# Altium PCB MCS17.PcbDoc (part 1 of 3)
Units mil, origin at the board's own origin, x right, y up, seen from the top; angles counter-clockwise.
Board outline 8500 x 5400 mil, 2 copper layers (Top Layer, Bottom Layer), stack 81.54 mil thick; 114 components, 70 nets, 364 pads, 106 vias.
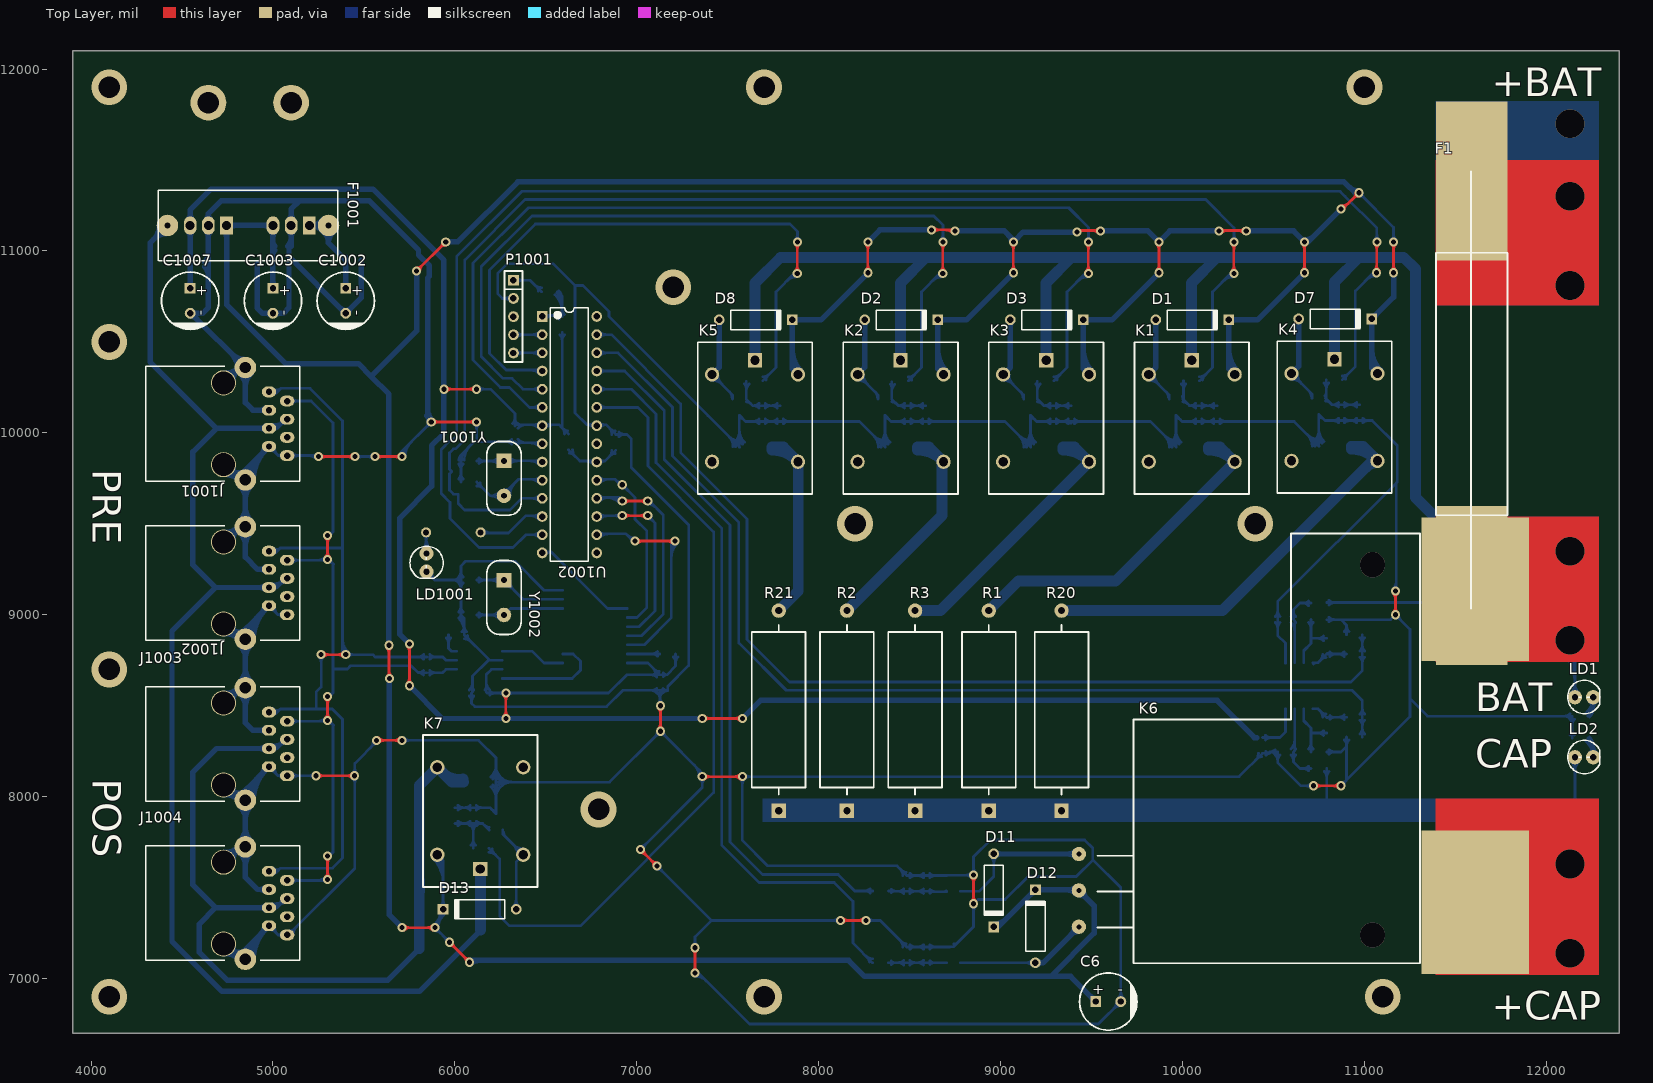
[diagram p0: Top Layer view]
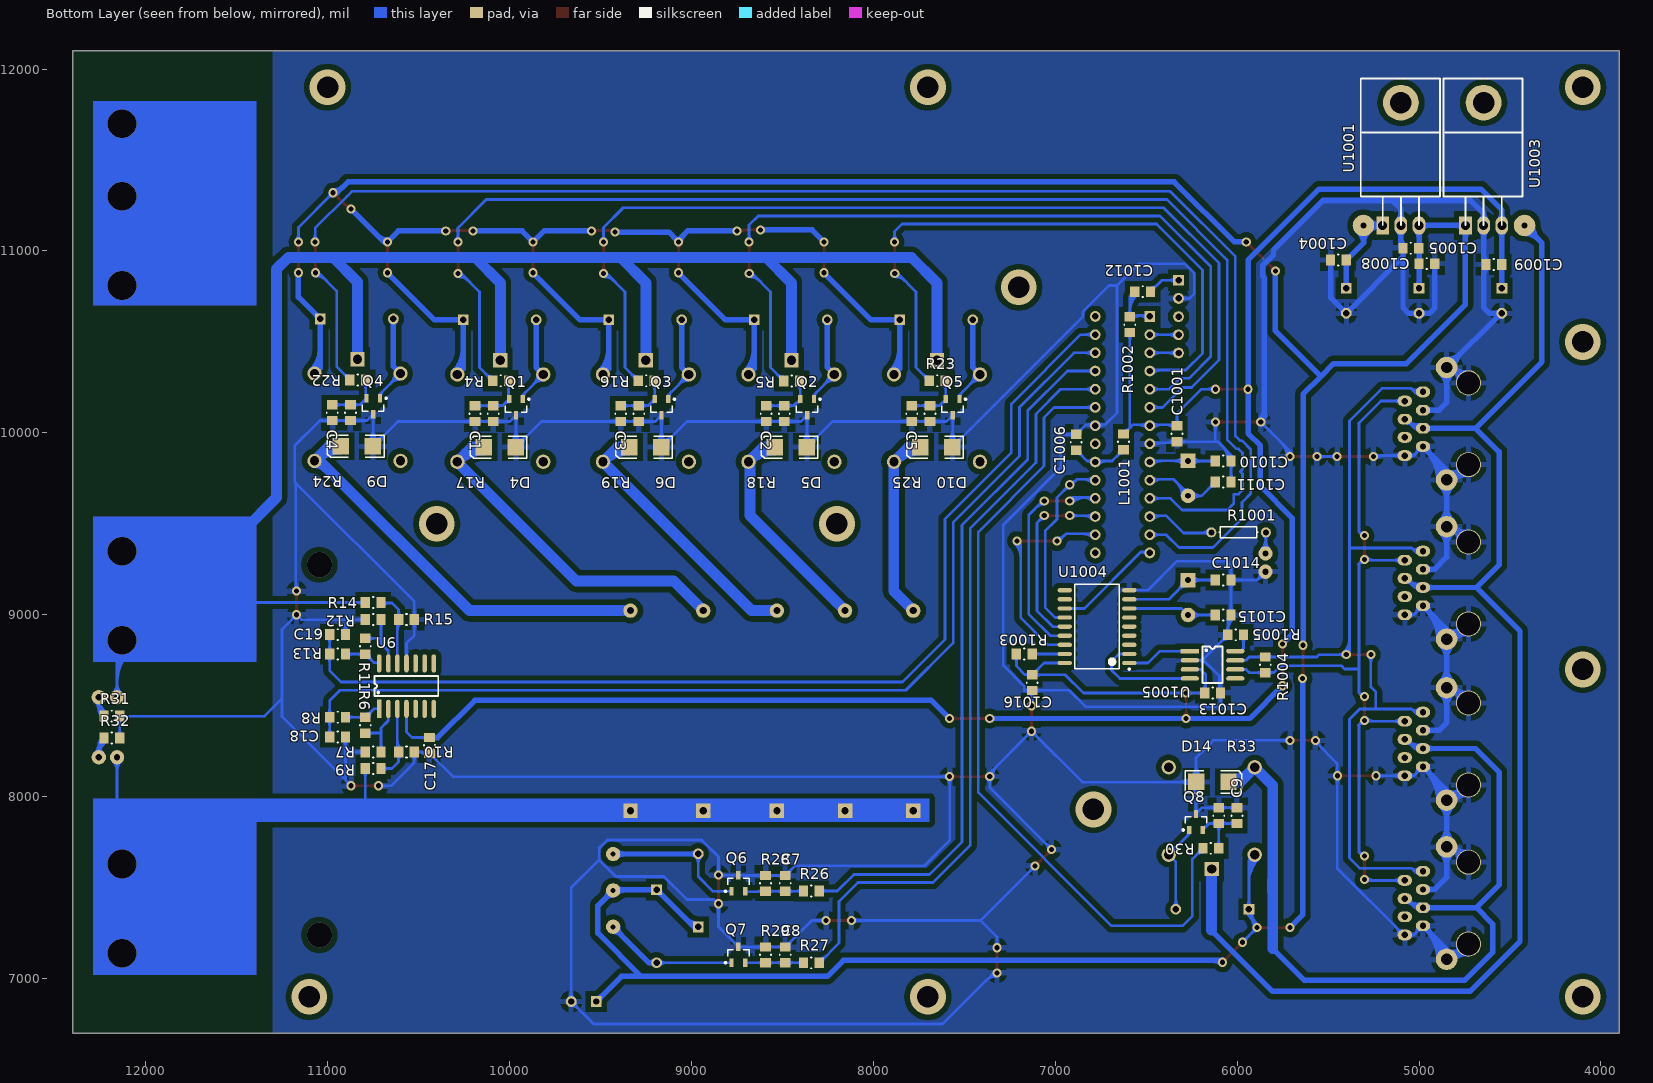
[diagram p1: Bottom Layer view, seen from below]
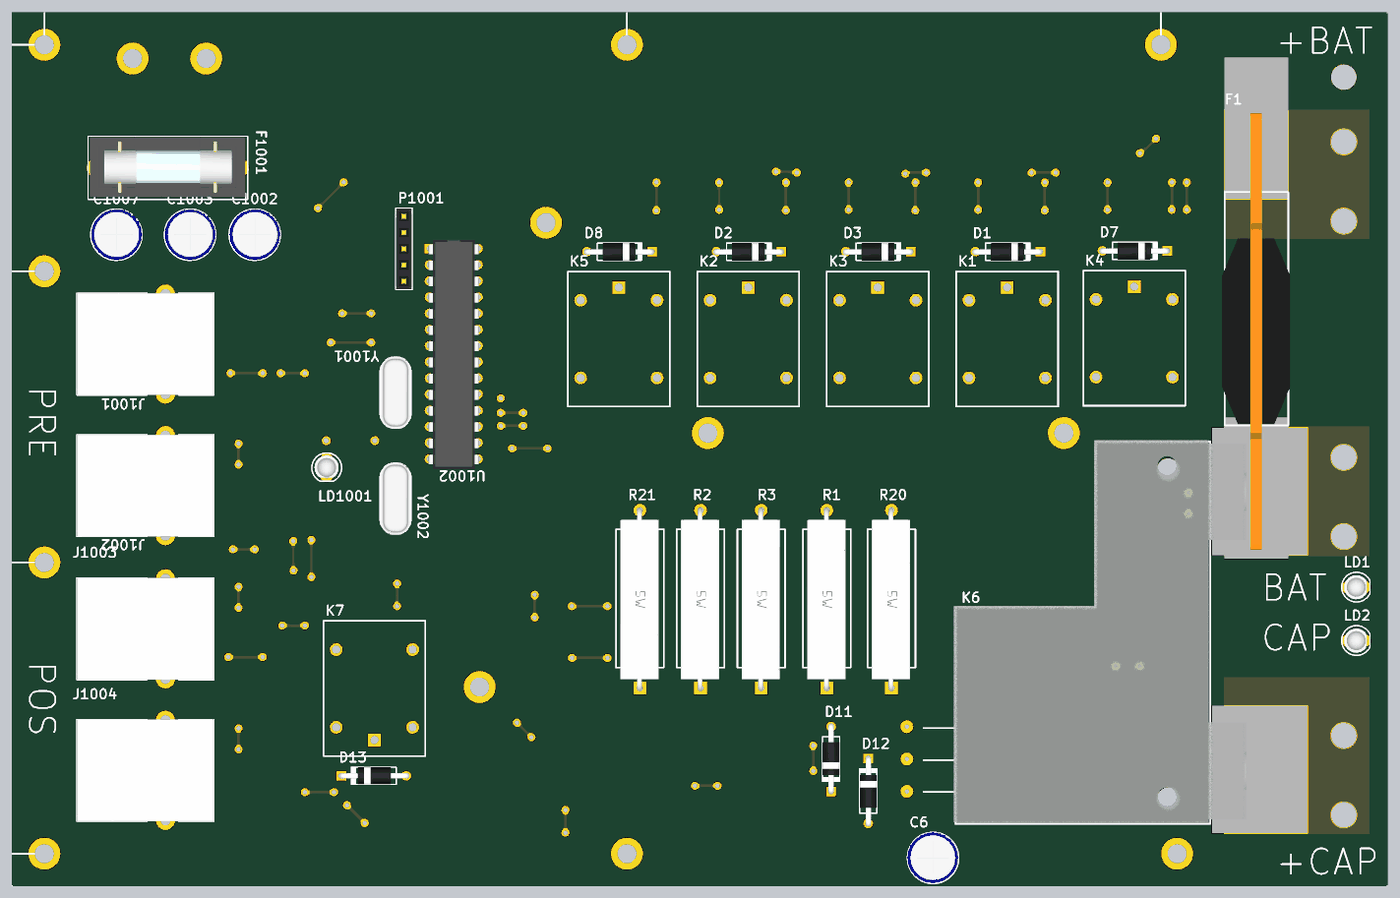
[diagram p4: 3D render of the assembled board from above, using the file's embedded part models]
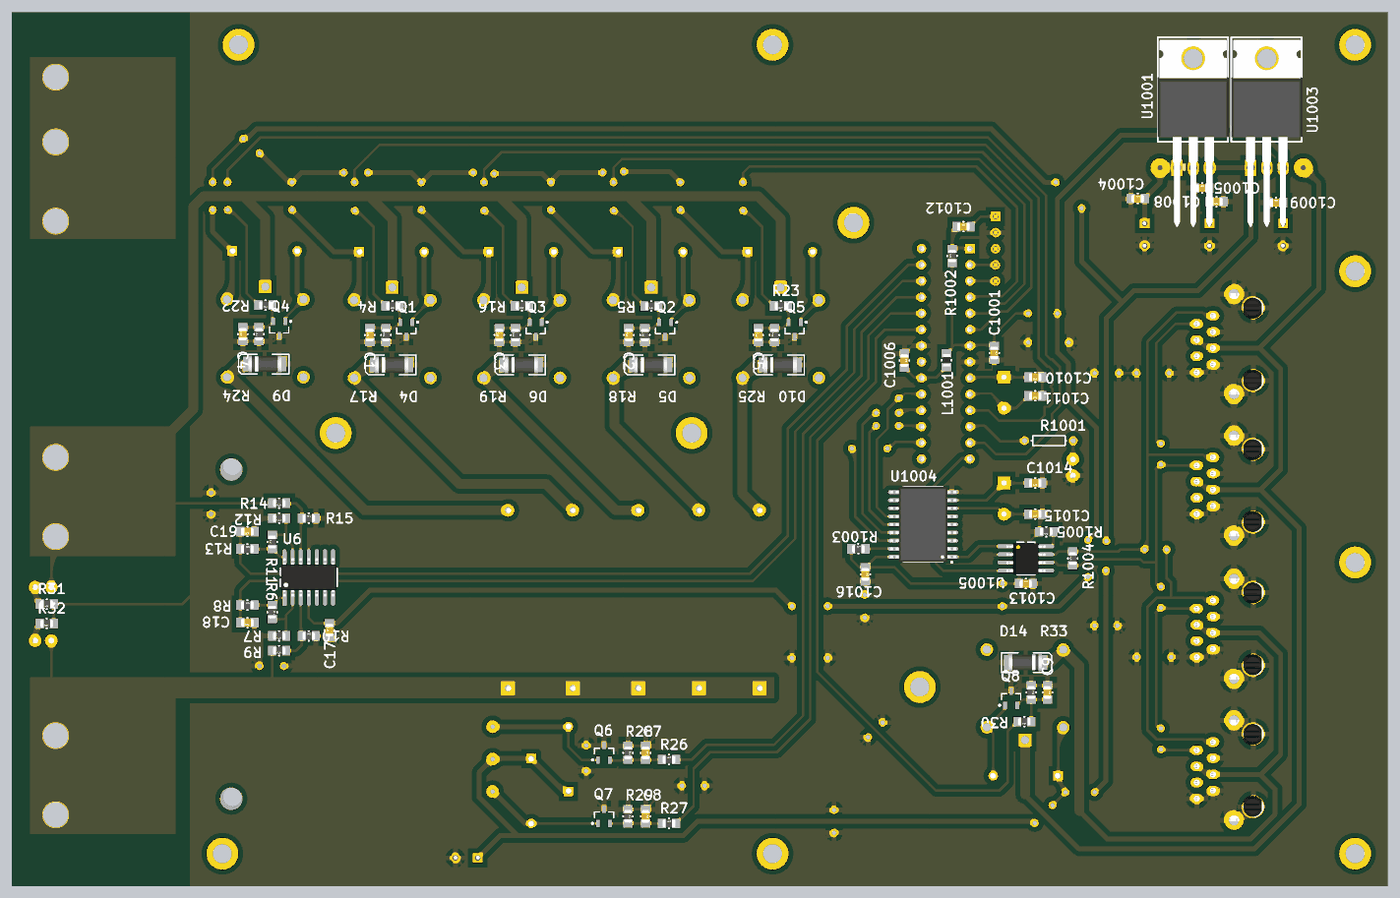
[diagram p5: 3D render of the assembled board from below, using the file's embedded part models]

## Layer stack, top to bottom
Top Layer: signal copper 1.4
Dielectric: core 78.7402, FR-4, Dk 4.8
Bottom Layer: signal copper 1.4

## Board outline
12400,12100 12400,6700 3900,6700 3900,12100

## Design rules (kind name [scope] priority, off if disabled: settings)
Clearance [All] p1: gap=30
PlaneClearance [All] p1: clearance=30
PlaneConnect [All] p1: planeconnectstyle=Relief reliefexpansion=20 reliefentries=4 reliefconductorwidth=30 reliefairgap=10
PolygonConnect [All] p1: connectstyle=Relief reliefconductorwidth=30 reliefentries=4 polygonreliefangle="90 Angle"
RoutingVias [All] p1: holewidth=28 width=50 viastyle="Through Hole" minholewidth=28 minwidth=50 maxholewidth=28 maxwidth=50
SilkscreenOverComponentPads [All] p1: minsilkscreentomaskgap=10
SolderMaskExpansion [All] p1: expansion=4
Width [All] p1: maxlimit=60 minlimit=15 preferedwidth=30
25 further rules are at their usual default settings.

## Classes and differential pairs
component class signals: C17 C18 C19 R6 R7 R8 R9 R10 R11 R12 R13 R14 R15 U6
component class relays: C1 C2 C3 C4 C5 C6 C7 C8 C9 D1 D2 D3 D4 D5 D6 D7 D8 D9 D10 D11 D12 D13 D14 F1 K1 K2 K3 K4 K5 K6 K7 LD1 LD2 Q1 Q2 Q3 Q4 Q5 Q6 Q7 Q8 R1 R2 R3 R4 R5 R16 R17 R18 R19 R20 R21 R22 R23 R24 R25 R26 R27 R28 R29 R30 R31 R32 R33
component class atmega: C10 C11 C12 C13 C14 C15 C16 C1001 C1002 C1003 C1004 C1005 C1006 C1007 C1008 C1009 C1010 C1011 C1012 C1013 C1014 C1015 C1016 F1001 J1 J2 J3 J4 J1001 J1002 J1003 J1004 L1 L1001 LD1001 P1 P1001 R1001 R1002 R1003 R1004 R1005 U1 U2 U3 U4 U5 U1001 U1002 U1003 U1004 U1005 Y1 Y2 Y1001 Y1002

## Components (designator, comment, footprint, x,y, rotation, side; value= is the part's Value field where it differs from the comment)
C1 "100nF" 0805C 10188.78,10106.26 r90 bottom
C2 "100nF" 0805C 8588.78,10106.26 r90 bottom
C3 "100nF" 0805C 9388.78,10106.26 r90 bottom
C4 "100nF" 0805C 10973.78,10111.26 r90 bottom
C5 "100nF" 0805C 7788.78,10106.26 r90 bottom
C6 "10uF" CP3.5mm-8.0mm 9522.8,6874 r180 top
C7 "100nF" 0805C 8484,7523.45 r270 bottom
C8 "100nF" 0805C 8484,7130.9 r270 bottom
C9 "100nF" 0805C 6001,7896.31 r270 bottom
C17 "100nF" 0805C 10439,8281.69 r90 bottom
C18 "100nF" 0805C 10945,8328 r0 bottom
C19 "100nF" 0805C 10945,8891 r0 bottom
C1001 "100nF" 0805C 6330,9995 r270 bottom
C1002 "CapacitorPol" CP3.5mm-8.0mm 5400,10795 r90 top
C1003 "CapacitorPol" CP3.5mm-8.0mm 5000,10795 r90 top
C1004 "100nF" 0805C 5443.31,10950 r180 bottom
C1005 "100nF" 0805C 5045,11015 r180 bottom
C1006 "100nF" 0805C 6885,9948.31 r270 bottom
C1007 "CapacitorPol" CP3.5mm-8.0mm 4545,10795 r90 top
C1008 "100nF" 0805C 4956.69,10930 r0 bottom
C1009 "100nF" 0805C 4588.31,10925 r180 bottom
C1010 "22pF" 0805C 6076.69,9845 r0 bottom
C1011 "22pF" 0805C 6076.69,9730 r0 bottom
C1012 "100nF" 0805C 6520,10776 r180 bottom
C1013 "100nF" 0805C 6135,8570 r180 bottom
C1014 "22pF" 0805C 6076.69,9191.06 r0 bottom
C1015 "22pF" 0805C 6076.69,8998.94 r0 bottom
C1016 "100nF" 0805C 7126.69,8626.69 r270 bottom
D1 "BYD77" DIO10.2-7X2.7 10053.78,10621.26 r0 top
D2 "BYD77" DIO10.2-7X2.7 8453.78,10621.26 r0 top
D3 "BYD77" DIO10.2-7X2.7 9253.78,10621.26 r0 top
D4 "MUR120" DSO-C2/X2.3 10053.78,9921.26 r0 bottom
D5 "MUR120" DSO-C2/X2.3 8453.78,9921.26 r0 bottom
D6 "MUR120" DSO-C2/X2.3 9253.78,9921.26 r0 bottom
D7 "BYD77" DIO10.2-7X2.7 10838.78,10626.26 r0 top
D8 "BYD77" DIO10.2-7X2.7 7653.78,10621.26 r0 top
D9 "MUR120" DSO-C2/X2.3 10838.78,9926.26 r0 bottom
D10 "MUR120" DSO-C2/X2.3 7653.78,9921.26 r0 bottom
D11 "MUR120" DIO10.2-7X2.7 8962,7485 r270 top
D12 "MUR120" DIO10.2-7X2.7 9191,7288 r90 top
D13 "BYD77" DIO10.2-7X2.7 6136,7381.31 r180 top
D14 "MUR120" DSO-C2/X2.3 6136,8081.31 r180 bottom
F1 "Fuse Mega 250A" FuseANL 11590,8760 r0 top
F1001 "250mA" "PORTA FUSIVEL" 5305.83,11140 r180 top
J1001 "RJ45 (canbus)" "ASSMANN A-2004-2-4-LP/FS" 4730,10050 r270 top
J1002 "RJ45 (canbus)" "ASSMANN A-2004-2-4-LP/FS" 4730,9175 r270 top
J1003 "RJ45 (canbus)" "ASSMANN A-2004-2-4-LP/FS" 4730,8290 r270 top
J1004 "RJ45 (canbus)" "ASSMANN A-2004-2-4-LP/FS" 4730,7415 r270 top
K1 "12V/10A" RELE 10050,10400 r0 top
K2 "12V/10A" RELE 8450,10400 r0 top
K3 "12V/10A" RELE 9250,10400 r0 top
K4 "12V/10A" RELE 10835,10405 r0 top
K5 "12V/10A" RELE 7650,10400 r0 top
K6 "Latch Relay K100A" K100A 9730,7085 r0 top locked
K7 "12V/10A" RELE 6139.78,7602.57 r180 top
L1001 "?H" 0805L 6625,9950 r90 bottom
LD1 "RED" LED3MM 12157,8547 r0 top
LD2 "GREEN" LED3MM 12157,8217 r0 top
LD1001 "GREEN" LED3MM 5844,9337 r270 top
P1001 "USART" HDR1X5 6322,10839 r270 top
Q1 "BCV27" SOT95P240-3N 9963.78,10141.26 r270 bottom
Q2 "BCV27" SOT95P240-3N 8363.78,10141.26 r270 bottom
Q3 "BCV27" SOT95P240-3N 9163.78,10141.26 r270 bottom
Q4 "BCV27" SOT95P240-3N 10748.78,10146.26 r270 bottom
Q5 "BCV27" SOT95P240-3N 7563.78,10141.26 r270 bottom
Q6 "BCV27" SOT95P240-3N 8741.6,7524.29 r90 bottom
Q7 "BCV27" SOT95P240-3N 8741.6,7131 r90 bottom
Q8 "BCV27" SOT95P240-3N 6226,7861.31 r90 bottom
R1 "4R7" R-AC10 8940,7931.5 r90 top
R2 "15R" R-AC10 8160,7931.5 r90 top
R3 "15R" R-AC10 8535,7931.5 r90 top
R4 "0805" 0805R 10048.78,10286.26 r0 bottom
R5 "0805" 0805R 8448.78,10284.57 r0 bottom
R6 "22k" 0805R 10792,8393 r270 bottom
R7 "100k" 0805R 10749,8246 r0 bottom
R8 "100k" 0805R 10945,8437 r180 bottom
R9 "100k" 0805R 10749,8155 r0 bottom
R10 "22k" 0805R 10566,8246 r180 bottom
R11 "22k" 0805R 10792,8827 r90 bottom
R12 "100k" 0805R 10749,8974 r0 bottom
R13 "100k" 0805R 10945,8784 r180 bottom
R14 "100k" 0805R 10749,9067 r0 bottom
R15 "22k" 0805R 10566,8974 r180 bottom
R16 "0805" 0805R 9248.78,10286.26 r0 bottom
R17 "0805" 0805R 10088.78,10106.26 r90 bottom
R18 "0805" 0805R 8488.78,10106.26 r90 bottom
R19 "0805" 0805R 9288.78,10106.26 r90 bottom
R20 "15R" R-AC10 9340,7931.5 r90 top
R21 "15R" R-AC10 7785,7931.5 r90 top
R22 "0805" 0805R 10833.78,10290.95 r0 bottom
R23 "0805" 0805R 7648.78,10286.26 r0 bottom
R24 "0805" 0805R 10873.78,10111.26 r90 bottom
R25 "0805" 0805R 7688.78,10106.26 r90 bottom
R26 "0805" 0805R 8340,7482 r180 bottom
R27 "0805" 0805R 8340,7087 r180 bottom
R28 "0805" 0805R 8593,7523.45 r270 bottom
R29 "0805" 0805R 8593,7130.9 r270 bottom
R30 "0805" 0805R 6144.31,7716.31 r0 bottom
R31 "0805" 0805R 12185.52,8443 r0 bottom
R32 "0805" 0805R 12185.52,8323 r0 bottom
R33 "0805" 0805R 6101,7896.31 r270 bottom
R1001 "470" AXIAL-0.3 5992,9453 r0 bottom
R1002 "10k" 0805R 6590,10595 r90 bottom
R1003 "10k" 0805R 7170,8785 r180 bottom
R1004 "120" 0805R 5845,8725 r90 bottom
R1005 "10k" 0805R 6008.31,8890 r0 bottom
U6 "LP324" SOIC14-150(50) 10716,8483 r270 bottom
U1001 "LM7812" TO220_DEITADO 5100,11297.48 r180 bottom
U1002 "ATmega328P" DIP28-300(100) 6480,10640 r270 top
U1003 "LM7805" TO220_DEITADO 4645,11297.48 r180 bottom
U1004 "MCP2515-E/SO" WSO18_L 6770,8935 r0 bottom
U1005 "MCP2551-I/SN" SOIC08-150(50) 6260,8800 r270 bottom
Y1001 "16MHz" HC49-US-THT 6270,9750 r270 top
Y1002 "16MHz" HC49-US-THT 6270,9095 r270 top

## Footprints (in the part's own frame and the unit in brackets; to place one, negate y for a bottom-side part, rotate by r counter-clockwise, add the part's x,y. Pads: shape width x height; smd on the part's side, far side on the other; paste and mask are expansions set on the pad)
0805C [mm] "Chip Capacitor; Body 2 x 1.3 mm (LxW typ)"
  rect 1.3x1.5 smd: 1(-1.1,0) 2(1.1,0)
  silkscreen extent -0.05,-0.76 0.05,0.76, body extent -1,-0.64 1,0.62, height 0.78
0805L [mm] "Chip Inductor; Body 2 x 1.3 mm (LxW typ)"
  rect 1.3x1.5 smd: 1(-1.1,0) 2(1.1,0)
  silkscreen extent -0.05,-0.76 0.05,0.76, body extent -1,-0.61 1,0.59, height 0.95
0805R [mm] "Chip Resistor; Body 2 x 1.3 mm (LxW typ)"
  rect 1.3x1.5 smd: 1(-1.1,0) 2(1.1,0)
  silkscreen extent -0.05,-0.76 0.05,0.76, body extent -1.01,-0.63 0.99,0.63, height 0.8
"ASSMANN A-2004-2-4-LP/FS" [mm]
  oval 1.5x2 hole 0.9: 1(-4.445,6.31) 2(-3.175,8.85) 3(-1.905,6.31) 4(-0.635,8.85) 5(0.635,6.31) 6(1.905,8.85) 7(3.175,6.31) 8(4.445,8.85)
  round 3 hole 1.6: S(-7.855,3.01) S(7.845,3.01)
  round 3.5 hole 3.2: S(-5.715,-0.04) S(5.715,-0.04)
  silkscreen extent -8,-10.9 8,10.6, body extent -8,-10.9 8,10.6, height 13.6
AXIAL-0.3 [mm] "Axial Device, Thru-Hole; 2 Leads; 0.3 in Pin Spacing"
  round 1.4 hole 0.85: 1(-3.81,0) 2(3.81,0)
  silkscreen extent -2.77,-0.76 2.77,0.76
CP3.5mm-8.0mm [mil] "Capacitor, Electrolytic, Radial; Body 8 x 10.5 mm (Dia.xH typ); Pin Spacing 3.5 mm (typ)"
  rect 60x60 hole 35: 1(0,0)
  round 60 hole 35: 2(-137.8,0)
  silkscreen extent -226,-157 89,157, body extent -226,-160 91,157, height 468
DIO10.2-7X2.7 [mm] "Diode, Axial; Body 7 x 2.7 mm (LxDia. max), Lead Dia. 0.53 mm (max)"
  round 1.5 hole 0.9: 1(-5.1,0)
  rect 1.5x1.5 hole 0.9: 2(5.1,0)
  silkscreen extent -3.5,-1.35 3.6,1.35, body extent -5.59,-1.4 5.44,1.34, height 2.73
DIP28-300(100) [mm] "DIP, 28-Leads, Row Spacing 7.62mm, Pitch 2.54mm, Body 34.67x7.3mm"
  rect 1.5x1.5 hole 0.9: 1(0,0)
  round 1.5 hole 0.9: 2(2.54,0) 3(5.08,0) 4(7.62,0) 5(10.16,0) 6(12.7,0) 7(15.24,0) 8(17.78,0) 9(20.32,0) 10(22.86,0) 11(25.4,0) 12(27.94,0) 13(30.48,0) 14(33.02,0) 15(33.02,7.62) 16(30.48,7.62) 17(27.94,7.62) 18(25.4,7.62) 19(22.86,7.62) 20(20.32,7.62) 21(17.78,7.62) 22(15.24,7.62) 23(12.7,7.62) 24(10.16,7.62) 25(7.62,7.62) 26(5.08,7.62) 27(2.54,7.62) 28(0,7.62)
  silkscreen extent -1.19,1.16 34.21,6.46, body extent -1.4,-0.13 34.6,7.74, height 5.08
DSO-C2/X2.3 [mm] "DO-214-AA/SMB; 2 C-Bend Leads; Body 5.3 x 3.6 mm, inc. leads (LxW)"
  rect 2.3x2.3 smd: 1(-2.25,0) 2(2.25,0)
  silkscreen extent -3.8,-1.55 4.1,1.55, body extent -2.62,-1.35 2.58,1.32, height 2.64
FuseANL [mm]
  rect 10x22.2 smd: 1(0,66.675) 2(0,10.16)
  silkscreen extent -5,6.98 5,67.98, body extent -5.42,0.48 5.31,69.06, height 18.95
HC49-US-THT [mil] "THT Quartz Crystal"
  rect 80x80 hole 32: 1(-96.06,0)
  round 80 hole 32: 2(96.06,0)
  silkscreen extent -203,-94 203,94, body extent -223,-91 224,92, height 138
HDR1X5 [mm] "Connector; Header; 5 Position"
  rect 1.5x1.5 hole 0.9: 1(0,0)
  round 1.5 hole 0.9: 2(2.54,0) 3(5.08,0) 4(7.62,0) 5(10.16,0)
  silkscreen extent -1.27,-1.27 11.43,1.27, body extent -1.27,-1.27 11.43,1.23, height 8.4
K100A [mm] "Latching Relay 100A, 12V coil"
  rect 15x20 smd: 1(47.752,8.509) 2(47.752,52.197)
  round 2 hole 0.7: 3(-7.62,15.24) 4(-7.62,10.16) 5(-7.62,5.08)
  silkscreen extent -5,0 40,60, body extent -0.28,0.23 45.72,60.23, height 21
LED3MM [mm]
  round 2 hole 0.889: 1(0,0) 2(2.54,0)
  silkscreen extent -1.03,-2.31 3.43,2.36, body extent -0.63,-1.9 2.87,1.9, height 5.5
"PORTA FUSIVEL" [mm]
  round 3 hole 0.8: 1(0,0) 2(22.5,0)
  silkscreen extent -1.27,-4.95 23.77,4.95, body extent -0.9,-4.8 23.5,4.6, height 12.6
R-AC10 [mm] "Cemented Wirewound Resistor 10 W"
  rect 2x2 hole 1: 1(-0.216,0.127)
  round 2 hole 1: 2(27.72,0.127)
  silkscreen extent 2.04,-3.62 25.72,3.88, body extent -0.65,-2.79 28.09,3.21, height 9.01
RELE [mm]
  rect 2x2 hole 1.3: 1(0,0)
  round 2 hole 1.3: 2(-6,-14.2) 3(6,-14.2) 4(6,-2) 5(-6,-2)
  silkscreen extent -8,-18.7 8,2.5, body extent -8.01,-18.66 8,2.52, height 15.4
SOIC08-150(50) [mil] "SOIC; 8 Leads; Row Spacing 3.81 mm; Pitch 1.27 mm; 3D Antonio Fagaldo"
  rect 25x100 smd: 1(0,0)
  oval 25x100 smd: 2(50,0) 3(100,0) 4(150,0) 5(150,250) 6(100,250) 7(50,250) 8(0,250)
  silkscreen extent -25,70 175,180, body extent -20,4 173,246, height 69
SOIC14-150(50) [mil] "Plastic Small Outline 14 pinos"
  rect 100x25 smd: 1(0,0)
  oval 100x25 smd: 2(0,50) 3(0,100) 4(0,150) 5(0,200) 6(0,250) 7(0,300) 8(-250,300) 9(-250,250) 10(-250,200) 11(-250,150) 12(-250,100) 13(-250,50) 14(-250,0)
  silkscreen extent -180,-25 -70,325, body extent -243,-22 -7,322, height 69
SOT95P240-3N [mm] "SOT23, 3-Leads, Body 2.9x1.3mm, Pitch 0.95mm, Lead Span 2.4mm, IPC Medium Density"
  rect 1.15x0.6 smd: 1(-1.125,0.95) 2(-1.125,-0.95) 3(1.125,0)
  silkscreen extent -1.25,-1.5 0.7,1.92, body extent -0.7,-1.5 0.7,1.5, height 1.14
TO220_DEITADO [mil]
  rect 70x100 hole 50: 1(-100,-157.48)
  oval 70x100 hole 50: 2(0,-157.48) 3(100,-157.48)
  silkscreen extent -220,-155 214,650, body extent -221,-522 220,632, height 185
WSO18_L [mm] "18-Pin Small Outline Integrated Circuit 1.27 mm Pitch, IPC High Density"
  oval 2x0.6 smd: 1(-4.5,5.08) 2(-4.5,3.81) 3(-4.5,2.54) 4(-4.5,1.27) 5(-4.5,0) 6(-4.5,-1.27) 7(-4.5,-2.54) 8(-4.5,-3.81) 9(-4.5,-5.08) 10(4.5,-5.08) 11(4.5,-3.81) 12(4.5,-2.54) 13(4.5,-1.27) 14(4.5,0) 15(4.5,1.27) 16(4.5,2.54) 17(4.5,3.81) 18(4.5,5.08)
  silkscreen extent -4.62,-5.9 3.1,6.05, body extent -5.21,-5.87 5.19,5.88, height 2.82

## Part data
C1 C2 C3 C4 C5 C7 C8 C9 C17 C18 C19: library part Cap, "Capacitor"
C6: library part CapacitorPol, "Solid Aluminum Capacitor with Organic Semiconductor Electrolyte: 100uF, 10V, Bulk Pack"
C1001 C1004 C1005 C1006 C1008 C1009 C1010 C1011 C1012 C1013 C1014 C1015 C1016: library part Cap_0805, "Capacitor"
C1002 C1003 C1007: "Solid Aluminum Capacitor with Organic Semiconductor Electrolyte: 100uF, 10V, Bulk Pack"
D1 D2 D3 D4 D5 D6 D7 D8 D9 D10 D11 D12 D13 D14: library part Diode, "Default Diode"
F1 F1001: library part "Fuse 1", "Fuse"
J1001 J1002 J1003 J1004: library part "Modular Jack with Shield", "YH-59-01"
K1 K2 K3 K4 K5 K6 K7: library part Relay, "SPDT Relay"
L1001: library part Ind_0805, "Inductor"
LD1 LD2 LD1001: library part LED_0805, "LED"
P1001: library part "Header 5", "Header, 5-Pin"
Q1 Q2 Q3 Q4 Q5 Q6 Q7 Q8: library part NPN1, "NPN Darlington Bipolar Transistor"
R1 R2 R3 R20 R21: library part ResistorPower, "Power Resistor"
R4 R5 R6 R7 R8 R9 R10 R11 R12 R13 R14 R15 R16 R17 R18 R19 R22 R23 R24 R25 R26 R27 R28 R29 R30 R31 R32 R33: library part Res1, "Resistor"
R1001 R1002 R1003 R1004 R1005: library part Res_0805, "Resistor"
U6: library part LM324, "Quadruple Operational Amplifier"
U1001 U1003: library part µA7805CKC, "Positive-Voltage Regulator"
U1002: "8-bit AVR Microcontroller, 32KB Flash, 1KB EEPROM, 2KB SRAM, 28-pin PDIP, Industrial Grade (-40°C to 85°C)"
U1004: library part CMP-0186-00035-2, "Stand-Alone CAN Controller With SPI Interface, 18-Pin SOIC, Extended Temperature"
U1005: library part CMP-1721-00003-1, "High-Speed CAN Transceiver, / 1 Mb/s, 4.5 to 5.5 V, 8-Pin SOIC (SN), Industrial Temperature, RoHS, Tube"
Y1001 Y1002: library part Crystal, "Crystal"

## Free pads (board coordinates)
  round 196.85 hole 118.11: 0(4645,11815) 0(5100,11815)

## Via types
v1: diameter 50, hole 28, Top Layer to Bottom Layer, 85 vias
v2: diameter 196.85, hole 118.11, Top Layer to Bottom Layer, 12 vias
v3: diameter 157.48, hole 157.48, Top Layer to Bottom Layer, 7 vias
v4: diameter 137.8, hole 137.8, Top Layer to Bottom Layer, 2 vias

## Nets (pads, with @x,y where several pads share a name; then routed paths per layer and width w, separated by ;. In a path a pad name is that pad's centre, name@x,y a point inside that pad or via, vN(x,y) a via of type N, cw(c..) or ccw(c..) an arc to the next point about the centre after c; other vN are vias at no path point)
+5V: C17.2 C1001.1 C1007.1 C1009.2 C1013.1 C1016.1 L1001.2 R1002.1 R1003.1 U6.4 U1002.7 U1003.3 U1004.18 U1005.3 | length 14510
  Top Layer w15: v1@5737.63,8622.37 ccw(c5707.75,8652.25) 5750,8652.25 ccw(c5792.25,8652.25) v1@5762.37,8622.37 ; v1@5737.63,8827.63 cw(c5707.75,8797.75) 5750,8797.75 cw(c5792.25,8797.75) v1@5762.37,8827.63 ; v1(5750,8610) v1(5750,8840) ; v1(5940,10240) v1(6120,10240) ; v1@5952.37,10227.63 cw(c5982.25,10197.75) 5982.25,10240 cw(c5982.25,10282.25) v1@5952.37,10252.37 ; v1@6107.63,10227.63 ccw(c6077.75,10197.75) 6077.75,10240 ccw(c6077.75,10282.25) v1@6107.63,10252.37 ; v1@6267.63,8442.37 ccw(c6237.75,8472.25) 6280,8472.25 ccw(c6322.25,8472.25) v1@6292.37,8442.37 ; v1@6267.63,8557.63 cw(c6237.75,8527.75) 6280,8527.75 cw(c6322.25,8527.75) v1@6292.37,8557.63 ; v1(6280,8430) v1(6280,8570) ; v1(7360,8430) v1(7580,8430) ; v1@7372.37,8417.63 cw(c7402.25,8387.75) 7402.25,8430 cw(c7402.25,8472.25) v1@7372.37,8442.37 ; v1@7567.63,8417.63 ccw(c7537.75,8387.75) 7537.75,8430 ccw(c7537.75,8472.25) v1@7567.63,8442.37
  Bottom Layer w15: v1(6120,10240) 6196.36,10240 6330,10106.36 C1001.1@6330,10038.31 ; v1@6132.37,10227.63 cw(c6162.25,10197.75) 6162.25,10240 cw(c6162.25,10282.25) v1@6132.37,10252.37 ; C1013.1@6165.52,8586.73 ccw(c6148.65,8603.59) 6172.5,8603.59 ; C1013.1@6172.5,8575.81 6172.5,8670.71 6201.79,8700 U1005.3@6260,8700 ; 6172.5,8631.63 ccw(c6236,8631.63) C1013.1@6191.1,8586.73 ; C1013.1@6178.31,8570 v1(6280,8570) 6845,8570 6945,8670 C1016.1@7126.69,8670 ; C1013.1@6191.1,8557.21 cw(c6221.98,8526.33) 6221.98,8570 cw(c6221.98,8613.67) C1013.1@6191.1,8582.79 ; v1@6267.63,8557.63 ccw(c6237.75,8527.75) 6237.75,8570 ccw(c6237.75,8612.25) v1@6267.63,8582.37 ; v1@6292.37,8557.63 cw(c6322.25,8527.75) 6322.25,8570 cw(c6322.25,8612.25) v1@6292.37,8582.37 ; C1001.1@6317.21,10051.1 ccw(c6286.33,10081.98) 6330,10081.98 ccw(c6373.67,10081.98) C1001.1@6342.79,10051.1 ; C1001.1@6336.69,10045 6573.31,10045 6590,10028.31 ; C1001.1@6346.73,10025.52 cw(c6393.77,9978.47) 6393.77,10045 ; C1001.1@6346.73,10051.1 ccw(c6361.45,10065.82) 6361.45,10045 ; 6414.75,10045 cw(c6414.75,9974.75) U1002.7@6464.42,10024.42 ; 6438.89,10045 ccw(c6438.89,10081.11) U1002.7@6464.42,10055.58 ; U1002.7@6495.58,10024.42 cw(c6545.25,9974.75) 6545.25,10045 ; U1002.7@6495.58,10055.58 ccw(c6521.11,10081.11) 6521.11,10045 ; R1002.1@6577.21,10538.9 cw(c6546.33,10508.02) 6590,10508.02 cw(c6633.67,10508.02) R1002.1@6602.79,10538.9 ; 6588.03,10030.27 cw(c6551.95,9994.19) L1001.2@6602.97,9993.54 ; R1002.1@6590,10551.69 6590,10028.31 ; 6596.9,10021.41 ccw(c6621.06,10045.57) L1001.2@6621.06,10011.4 ; L1001.2@6625,9993.31 6590,10028.31 ; U1004.18@6947.17,8735 7061.69,8735 C1016.1@7126.69,8670 ; 7089.09,8707.6 cw(c7051.49,8670) C1016.1@7104.67,8670 ; 7098.59,8698.1 ccw(c7122.76,8722.26) C1016.1@7122.76,8688.09 ; C1016.1@7109.96,8657.21 ccw(c7079.08,8626.33) 7079.08,8670 ccw(c7079.08,8713.67) C1016.1@7109.96,8682.79 ; C1016.1@7145.54,8659.76 cw(c7165,8646.4) 7165,8670 ; C1016.1@7145.54,8680.24 ccw(c7165,8693.6) 7165,8670 ; R1003.1@7200.52,8768.27 cw(c7169.63,8737.39) 7213.31,8737.39 cw(c7256.98,8737.39) R1003.1@7226.1,8768.27 ; R1003.1@7213.31,8785 7213.31,8718.31 7165,8670 ; C17.2@10439,8325 10535,8325 10566,8356 U6.4@10566,8483 ; C17.2@10455.73,8312.21 cw(c10486.61,8281.33) 10486.61,8325 cw(c10486.61,8368.67) C17.2@10455.73,8337.79 ; C1016.1@7126.69,8670 7165,8670
  Bottom Layer w30: U1003.3@4530.86,11110.86 cw(c4496.72,11076.72) 4545,11076.72 cw(c4593.28,11076.72) U1003.3@4559.14,11110.86 ; U1003.3@4530.86,11169.14 ccw(c4496.72,11203.28) 4545,11203.28 ccw(c4593.28,11203.28) U1003.3@4559.14,11169.14 ; C1007.1@4534.39,10805.61 ccw(c4508.79,10831.21) 4545,10831.21 ccw(c4581.21,10831.21) C1007.1@4555.61,10805.61 ; C1007.1@4545,10795 C1009.2@4545,10925 U1003.3@4545,11140 4545,11225 4660,11340 5550,11340 5940,10950 v1(5940,10240) 5940,9997.65 5872.8,9930.45 5872.8,9707.04 5697.5,9531.75 5697.5,8892.5 v1(5750,8840) ; v1(5750,8610) 5930,8430 6270,8430 v1(6280,8430) v1(7360,8430) ; v1(7580,8430) 7680,8530 10190,8530 10395,8325 10408.89,8325
+5V_ADC: C1006.2 L1001.1 U1002.20 | length 590.8
  Bottom Layer w15: L1001.1@6625,9906.69 6686.69,9845 6780,9845 6825,9845 ; L1001.1@6628.94,9888.6 cw(c6628.94,9854.43) 6653.1,9878.59 ; L1001.1@6647.03,9906.69 ccw(c6700.21,9906.69) 6662.6,9869.09 ; 6714.75,9845 cw(c6714.75,9774.75) U1002.20@6764.42,9824.42 ; 6738.89,9845 ccw(c6738.89,9881.11) U1002.20@6764.42,9855.58 ; U1002.20@6795.58,9855.58 ccw(c6821.11,9881.11) 6821.11,9845 ; U1002.20@6799.45,9829.65 cw(c6825,9816.05) 6825,9845 ; 6847.4,9867.4 ccw(c6809.79,9905) C1006.2@6862.97,9905 ; 6856.9,9876.9 cw(c6881.06,9852.74) C1006.2@6881.06,9886.91 ; C1006.2@6885,9905 6825,9845
+12V: C6.1 C1003.1 C1005.2 C1008.2 D1.2 D2.2 D3.2 D7.2 D8.2 D11.2 D12.2 D13.2 K1.4 K2.4 K3.4 K4.4 K5.4 K6.4 K7.4 U1001.3 U1003.1 | length 30217.2
  Top Layer w15: v1@5625.13,8820.13 cw(c5595.25,8790.25) 5637.5,8790.25 cw(c5679.75,8790.25) v1@5649.87,8820.13 ; v1@5627.63,8662.37 ccw(c5603.79,8686.21) 5637.5,8686.21 ; 5637.5,8698.28 ccw(c5688.28,8698.28) v1@5652.37,8662.37 ; v1(5637.5,8832.5) 5637.5,8652.5 v1(5640,8650) ; v1(5710,7280) v1(5890,7280) ; v1@5722.37,7267.63 cw(c5752.25,7237.75) 5752.25,7280 cw(c5752.25,7322.25) v1@5722.37,7292.37 ; v1(5790,10890) v1(5950,11050) ; v1@5790,10907.5 ccw(c5790,10949.75) 5819.87,10919.87 ccw(c5849.75,10890) v1@5807.5,10890 ; v1@5877.63,7267.63 ccw(c5847.75,7237.75) 5847.75,7280 ccw(c5847.75,7322.25) v1@5877.63,7292.37 ; v1@5932.5,11050 cw(c5890.25,11050) 5920.13,11020.13 cw(c5950,10990.25) v1@5950,11032.5 ; v1@5970,7182.5 cw(c5970,7140.25) 5999.87,7170.13 cw(c6029.75,7200) v1@5987.5,7200 ; v1(5970,7200) v1(6080,7090) ; v1@6062.5,7090 ccw(c6020.25,7090) 6050.13,7119.87 ccw(c6080,7149.75) v1@6080,7107.5 ; v1@8257.63,10892.37 ccw(c8227.75,10922.25) 8270,10922.25 ccw(c8312.25,10922.25) v1@8282.37,10892.37 ; v1@8257.63,11037.63 cw(c8227.75,11007.75) 8270,11007.75 cw(c8312.25,11007.75) v1@8282.37,11037.63 ; v1(8270,10880) v1(8270,11050) ; v1(8620.5,11116.11) v1@8743.89,11116.11 ; v1@8632.87,11103.74 cw(c8662.75,11073.86) 8662.75,11116.11 cw(c8662.75,11158.36) v1@8632.87,11128.49 ; 8693,11116.11 cw(c8693,11053) v1@8737.63,11097.63 ; 8722.51,11116.11 ccw(c8722.51,11137.49) v1@8737.63,11122.37 ; v1@9057.63,10892.37 ccw(c9027.75,10922.25) 9070,10922.25 ccw(c9112.25,10922.25) v1@9082.37,10892.37 ; v1@9057.63,11037.63 cw(c9027.75,11007.75) 9070,11007.75 cw(c9112.25,11007.75) v1@9082.37,11037.63 ; v1(9070,10880) v1(9070,11050) ; v1@9429.89,11112.5 v1@9547.5,11112.5 ; 9501.72,11112.5 cw(c9501.72,11061.72) v1@9537.63,11097.63 ; 9513.79,11112.5 ccw(c9513.79,11146.21) v1@9537.63,11122.37 ; v1@9857.63,10892.37 ccw(c9827.75,10922.25) 9870,10922.25 ccw(c9912.25,10922.25) v1@9882.37,10892.37 ; v1@9857.63,11037.63 cw(c9827.75,11007.75) 9870,11007.75 cw(c9912.25,11007.75) v1@9882.37,11037.63 ; v1(9870,10880) v1(9870,11050) ; v1@10202.5,11112.5 v1@10347.5,11112.5 ; v1@10212.37,11097.63 cw(c10248.28,11061.72) 10248.28,11112.5 ; v1@10212.37,11122.37 ccw(c10236.21,11146.21) 10236.21,11112.5 ; 10301.72,11112.5 cw(c10301.72,11061.72) v1@10337.63,11097.63 ; 10313.79,11112.5 ccw(c10313.79,11146.21) v1@10337.63,11122.37 ; v1@10657.63,10892.37 ccw(c10627.75,10922.25) 10670,10922.25 ccw(c10712.25,10922.25) v1@10682.37,10892.37 ; v1@10657.63,11037.63 cw(c10627.75,11007.75) 10670,11007.75 cw(c10712.25,11007.75) v1@10682.37,11037.63 ; v1(10670,10880) v1(10670,11050) ; v1(10870,11230) 10880,11230 v1(10970,11320) ; v1@10870,11247.5 ccw(c10870,11313.89) 10916.95,11266.95 ; v1@10887.5,11230 cw(c10905.61,11230) 10892.8,11242.8 ; v1@10952.5,11320 cw(c10910.25,11320) 10940.13,11290.13 cw(c10970,11260.25) v1@10970,11302.5 ; v1@11147.63,10892.37 ccw(c11117.75,10922.25) 11160,10922.25 ccw(c11202.25,10922.25) v1@11172.37,10892.37 ; v1@11147.63,11037.63 cw(c11117.75,11007.75) 11160,11007.75 cw(c11202.25,11007.75) v1@11172.37,11037.63 ; v1(11160,10880) v1(11160,11050)
  Bottom Layer w15: v1@5871.69,7281.69 5888.31,7281.69 v1(5890,7280) v1(5970,7200) ; v1@5880,7290 5935.21,7345.21 ; K7.4@5881.02,7658.77 cw(c5750.2,7527.94) 5935.21,7527.94 ; v1@5890,7262.5 cw(c5890,7220.25) 5919.87,7250.13 cw(c5949.75,7280) 5907.5,7280 cw(c5998.03,7280) 5934.02,7344.02 ; K7.4@5891.63,7669.38 cw(c5786.41,7564.16) 5935.21,7564.16 ; v1@5892.5,7280 cw(c5946.82,7280) 5908.41,7318.41 ; 5898.05,7308.05 ccw(c5851.49,7354.61) D13.2@5914.23,7374.62 ; K7.4@5902.24,7679.98 cw(c5822.62,7600.37) 5935.21,7600.37 ; K7.4@5903.56,7681.31 5935.21,7649.65 D13.2@5935.21,7381.31 5935.21,7345.21 ; K7.4@5912.84,7690.59 cw(c5858.84,7636.58) 5935.21,7636.58 ; 5915.47,7325.47 ccw(c5877.9,7363.03) D13.2@5928.52,7379.17 ; D13.2@5919.64,7396.88 ccw(c5882.03,7434.49) 5935.21,7434.49 ccw(c5988.39,7434.49) D13.2@5950.79,7396.88 ; D13.2@5925.14,7361.72 cw(c5916.66,7345.21) 5935.21,7345.21 ; 5932.88,7342.88 ccw(c5904.31,7371.45) D13.2@5942.81,7383.73 ; D13.2@5945.28,7361.72 ccw(c5953.77,7345.21) 5935.21,7345.21 ; v1@5952.5,7200 ccw(c5910.25,7200) 5940.13,7229.87 ccw(c5970,7259.75) v1@5970,7217.5 ; v1(6080,7090) v1@6080,7100 ; v1@10970,11302.5 cw(c10970,11260.25) 10999.87,11290.13 cw(c11029.75,11320) v1@10987.5,11320 ; v1(10970,11320) 11160,11130 v1(11160,11050) ; v1@11147.63,11062.37 ccw(c11117.75,11092.25) 11160,11092.25 ccw(c11202.25,11092.25) v1@11172.37,11062.37
  Bottom Layer w30: U1003.1@4730.86,11110.86 cw(c4696.72,11076.72) 4745,11076.72 cw(c4793.28,11076.72) U1003.1@4759.14,11110.86 ; U1003.1@4759.14,11125.86 cw(c4793.28,11091.72) 4793.28,11140 cw(c4793.28,11188.28) U1003.1@4759.14,11154.14 ; U1001.3@4985.86,11110.86 cw(c4951.72,11076.72) 5000,11076.72 cw(c5048.28,11076.72) U1001.3@5014.14,11110.86 ; U1001.3@4985.86,11125.86 ccw(c4951.72,11091.72) 4951.72,11140 ccw(c4951.72,11188.28) U1001.3@4985.86,11154.14 ; C1003.1@4989.39,10805.61 ccw(c4963.79,10831.21) 5000,10831.21 ccw(c5036.21,10831.21) C1003.1@5010.61,10805.61 ; C1003.1@5000,10795 C1008.2@5000,10930 5000,11015 U1001.3@5000,11140 U1003.1@4745,11140 4745,10705 5070,10380 5470,10380 5540,10310 ; 5000,10981.41 cw(c5031.35,10981.41) C1005.2@5009.18,11003.57 ; 5000,11048.59 ccw(c5031.35,11048.59) C1005.2@5009.18,11026.43 ; v1(5637.5,8832.5) 5637.5,10212.5 5540,10310 ; v1(5640,8650) 5640,7350 v1(5710,7280) ; v1(5790,10890) 5790,10560 5540,10310 ; v1(5950,11050) 6015.75,11050 6345.75,11380 10887.25,11380 10947.25,11320 v1(10970,11320) ; v1@6080,7100 8164.94,7100 8252.46,7012.47 9276.79,7012.47 ; v1@6087.07,7082.93 cw(c6128.28,7041.72) 6128.28,7100 ; D8.2@7844.29,10610.99 cw(c7819.49,10586.19) 7854.57,10586.19 cw(c7889.64,10586.19) 7864.84,10610.99 cw(c7889.64,10586.19) 7889.64,10621.26 cw(c7889.64,10656.33) D8.2@7864.84,10631.53 ; 7854.57,10384.09 ccw(c7949.05,10384.09) K5.4@7882.24,10317.28 ; 7854.57,10456.52 ccw(c8021.48,10456.52) K5.4@7903.45,10338.49 ; K5.4@7886.22,10321.26 7854.57,10352.91 D8.2@7854.57,10621.26 8011.26,10621.26 v1(8270,10880) ; v1(8270,11050) 8336.11,11116.11 v1(8620.5,11116.11) ; D2.2@8644.29,10610.99 cw(c8619.49,10586.19) 8654.57,10586.19 cw(c8689.64,10586.19) 8664.84,10610.99 cw(c8689.64,10586.19) 8689.64,10621.26 cw(c8689.64,10656.33) D2.2@8664.84,10631.53 ; 8654.57,10384.09 ccw(c8749.05,10384.09) K2.4@8682.24,10317.28 ; 8654.57,10456.52 ccw(c8821.48,10456.52) K2.4@8703.45,10338.49 ; K2.4@8686.22,10321.26 8654.57,10352.91 D2.2@8654.57,10621.26 8811.26,10621.26 v1(9070,10880) ; v1(8750,11110) 9020,11110 9075,11055 9123.11,11103.11 v1(9420.5,11103.11) ; D11.2@8962,7298.74 ccw(c8962,7392.78) 9028.5,7326.28 ; D11.2@8986.43,7284.21 D12.2@9191,7488.79 9426.21,7488.79 K6.4@9430,7485 9514.37,7400.63 9514.37,7250.05 9276.79,7012.47 ; 9045.86,11084.14 cw(c9011.72,11050) v1@9060,11050 ; D12.2@9176.47,7488.79 cw(c9141.4,7488.79) 9166.2,7463.99 cw(c9191,7439.19) D12.2@9191,7474.26 ; D12.2@9201.27,7478.51 cw(c9226.07,7453.71) 9226.07,7488.79 cw(c9226.07,7523.86) D12.2@9201.27,7499.06 ; 9362.02,7488.79 cw(c9362.02,7417.02) K6.4@9412.77,7467.77 ; 9380.31,7488.79 ccw(c9380.31,7534.69) K6.4@9412.77,7502.23 ; K6.4@9430,7460.63 cw(c9430,7401.8) 9471.6,7443.4 cw(c9513.2,7485) K6.4@9454.37,7485 ; D3.2@9444.29,10610.99 cw(c9419.49,10586.19) 9454.57,10586.19 cw(c9489.64,10586.19) 9464.84,10610.99 cw(c9489.64,10586.19) 9489.64,10621.26 cw(c9489.64,10656.33) D3.2@9464.84,10631.53 ; 9454.57,10384.09 ccw(c9549.05,10384.09) K3.4@9482.24,10317.28 ; 9454.57,10456.52 ccw(c9621.48,10456.52) K3.4@9503.45,10338.49 ; K3.4@9486.22,10321.26 9454.57,10352.91 D3.2@9454.57,10621.26 9611.26,10621.26 v1(9870,10880) ; C6.1@9507.8,6874 ccw(c9471.58,6874) 9497.19,6899.61 ccw(c9522.8,6925.21) C6.1@9522.8,6889 ; C6.1@9522.8,6874 9384.32,7012.47 9276.79,7012.47 ; v1(9550,11110) 9810,11110 v1(9870,11050) 9930,11110 v1(10200,11110) ; D1.2@10244.29,10610.99 cw(c10219.49,10586.19) 10254.57,10586.19 cw(c10289.64,10586.19) 10264.84,10610.99 cw(c10289.64,10586.19) 10289.64,10621.26 cw(c10289.64,10656.33) D1.2@10264.84,10631.53 ; 10254.57,10384.09 ccw(c10349.05,10384.09) K1.4@10282.24,10317.28 ; 10254.57,10456.52 ccw(c10421.48,10456.52) K1.4@10303.45,10338.49 ; K1.4@10286.22,10321.26 10254.57,10352.91 D1.2@10254.57,10621.26 10411.26,10621.26 v1(10670,10880) ; v1(10350,11110) 10610,11110 v1(10670,11050) 10690,11050 v1(10870,11230) ; v1@10670,11060 ccw(c10670,11132.43) 10721.21,11081.21 ; 10914.09,11353.16 ccw(c10970,11409.07) v1@10970,11330 ; D7.2@11029.29,10615.99 cw(c11004.49,10591.19) 11039.57,10591.19 cw(c11074.64,10591.19) D7.2@11049.84,10615.99 ; 11039.57,10389.09 ccw(c11134.05,10389.09) K4.4@11067.24,10322.28 ; 11039.57,10461.52 ccw(c11206.48,10461.52) K4.4@11088.45,10343.49 ; D7.2@11039.57,10640.79 ccw(c11039.57,10675.86) 11064.37,10651.06 ccw(c11089.17,10626.26) D7.2@11054.09,10626.26 ; K4.4@11071.22,10326.26 11039.57,10357.91 D7.2@11039.57,10626.26 11160,10746.69 v1(11160,10880)
+18V: C1002.1 C1004.2 F1001.1 U1001.1 | length 955.1
  Bottom Layer w30: U1001.1@5214.14,11125.86 cw(c5248.28,11091.72) 5248.28,11140 cw(c5248.28,11188.28) U1001.1@5214.14,11154.14 ; F1001.1@5274.56,11108.96 ccw(c5200.01,11034.94) U1001.1@5200,11140 ; F1001.1@5274.56,11171.04 cw(c5200.01,11245.06) U1001.1@5200,11140 ; F1001.1@5276.89,11106.78 cw(c5223.06,11045) 5305,11045 ; F1001.1@5333.8,11105.97 ccw(c5383.93,11045) 5305,11045 ; C1004.2@5375.2,10974.8 ccw(c5400,10999.6) C1004.2@5400,10964.53 ; C1002.1@5389.39,10805.61 ccw(c5363.79,10831.21) 5400,10831.21 ccw(c5436.21,10831.21) C1002.1@5410.61,10805.61 ; C1002.1@5400,10795 C1004.2@5400,10950 5305,11045 ; U1001.1@5200,11140 5305,11140 5305,11045
+18V_POS: D14.2 J1003.4 J1003.5 J1004.4 J1004.5 K7.3 | length 5536.5
  Bottom Layer w15: J1004.5@4978.43,7390 5023.79,7390 ; J1003.5@4978.43,8265 5023.79,8265 ; J1004.5@4987.24,7382.09 ccw(c4993.93,7433.62) 5030.67,7396.88 ; J1003.5@4987.24,8257.09 ccw(c4993.93,8308.62) 5030.67,8271.88 ; J1004.5@4989.17,7396.97 ccw(c4998.88,7471.79) J1004.4@5052.23,7418.44 ; J1003.5@4989.17,8271.97 ccw(c4998.88,8346.79) J1003.4@5052.23,8293.44 ; J1004.5@4991.1,7411.84 ccw(c5003.84,7509.95) J1004.4@5073.79,7440 ; J1003.5@4991.1,8286.84 ccw(c5003.84,8384.95) J1003.4@5073.79,8315 ; J1004.5@5008,7380.21 cw(c5023.79,7372.37) 5023.79,7390 ; J1004.5@5008,7399.79 ccw(c5023.79,7407.63) 5023.79,7390 ; J1003.5@5008,8255.21 cw(c5023.79,8247.37) 5023.79,8265 ; J1003.5@5008,8274.79 ccw(c5023.79,8282.63) 5023.79,8265 ; 5027.3,7393.5 ccw(c4980.8,7440) J1004.4@5046.56,7440 ; 5027.3,8268.5 ccw(c4980.8,8315) J1003.4@5046.56,8315 ; 5039.87,7406.08 cw(c5068.58,7377.37) J1004.4@5068.58,7417.97 ; 5039.87,8281.08 cw(c5068.58,8252.37) J1003.4@5068.58,8292.97 ; J1004.4@5078.43,7440 J1004.4@5073.79,7440 ; J1003.4@5078.43,8315 J1003.4@5073.79,8315 ; 5023.79,7390 J1004.4@5073.79,7440 ; 5023.79,8265 J1003.4@5073.79,8315
  Bottom Layer w30: J1004.5@4958.31,7379.73 ccw(c4933.51,7354.93) 4933.51,7390 ccw(c4933.51,7425.07) J1004.5@4958.31,7400.27 ; J1003.5@4958.31,8254.73 ccw(c4933.51,8229.93) 4933.51,8265 ccw(c4933.51,8300.07) J1003.5@4958.31,8275.27 ; J1004.5@4978.43,7390 4685,7390 ; J1003.5@4978.43,8265 4690,8265 4560,8135 4560,7515 4685,7390 ; 5804.19,7164.19 5630,6990 4750,6990 4595,7145 4595,7300 4685,7390
  Bottom Layer w60: 5804.19,7164.19 5804.19,7478.12 5805,7478.93 5805,7541.07 5804.19,7541.88 5804.19,8062.25 K7.3@5903.56,8161.62 5983.87,8081.31 D14.2@6047.42,8081.31 ; 5935.34,8129.85 ccw(c6021.57,8216.08) D14.2@6044.54,8096.31
+18V_PRE: F1001.2 J1001.4 J1001.5 J1002.4 J1002.5 K7.1 | length 8369.6
  Bottom Layer w15: J1002.5@4978.43,9150 5023.79,9150 ; J1001.5@4978.43,10025 5023.79,10025 ; J1002.5@4987.24,9142.09 ccw(c4993.93,9193.62) 5030.67,9156.88 ; J1001.5@4987.24,10017.09 ccw(c4993.93,10068.62) 5030.67,10031.88 ; J1002.5@4989.17,9156.97 ccw(c4998.88,9231.79) J1002.4@5052.23,9178.44 ; J1001.5@4989.17,10031.97 ccw(c4998.88,10106.79) J1001.4@5052.23,10053.44 ; J1002.5@4991.1,9171.84 ccw(c5003.84,9269.95) J1002.4@5073.79,9200 ; J1001.5@4991.1,10046.84 ccw(c5003.84,10144.95) J1001.4@5073.79,10075 ; J1002.5@5008,9140.21 cw(c5023.79,9132.37) 5023.79,9150 ; J1002.5@5008,9159.79 ccw(c5023.79,9167.63) 5023.79,9150 ; J1001.5@5008,10015.21 cw(c5023.79,10007.37) 5023.79,10025 ; J1001.5@5008,10034.79 ccw(c5023.79,10042.63) 5023.79,10025 ; 5027.3,9153.5 ccw(c4980.8,9200) J1002.4@5046.56,9200 ; 5027.3,10028.5 ccw(c4980.8,10075) J1001.4@5046.56,10075 ; 5039.87,9166.08 cw(c5068.58,9137.37) J1002.4@5068.58,9177.97 ; 5039.87,10041.08 cw(c5068.58,10012.37) J1001.4@5068.58,10052.97 ; J1002.4@5078.43,9200 J1002.4@5073.79,9200 ; J1001.4@5078.43,10075 J1001.4@5073.79,10075 ; 5023.79,9150 J1002.4@5073.79,9200 ; 5023.79,10025 J1001.4@5073.79,10075
  Bottom Layer w30: F1001.2@4375.94,11140 cw(c4269.59,11140) 4344.79,11064.79 cw(c4420,10989.59) F1001.2@4420,11095.94 ; F1001.2@4420,11140 4325,11045 4325,10390 4690,10025 ; J1002.5@4958.31,9139.73 ccw(c4933.51,9114.93) 4933.51,9150 ccw(c4933.51,9185.07) J1002.5@4958.31,9160.27 ; J1001.5@4958.31,10014.73 ccw(c4933.51,9989.93) 4933.51,10025 ccw(c4933.51,10060.07) J1001.5@4958.31,10035.27 ; J1002.5@4978.43,9150 4685,9150 ; J1001.5@4978.43,10025 4690,10025 ; 6137.5,7262.5 5805,6930 4720,6930 4445,7205 4445,8910 4685,9150 ; 4685,9150 4560,9275 4560,9895 4690,10025
  Bottom Layer w60: 6139.78,7267.53 K7.1@6139.78,7602.57
+BAT: F1.2 K1.1 K2.1 K3.1 K4.1 K5.1 K6.2 LD1.1 R14.2 | length 10120.2
  Bottom Layer w15: R14.2@10792.31,9067 11130,9067 11145,9067 11457,9067 ; R14.2@10805.1,9054.21 cw(c10835.98,9023.33) 10835.98,9067 cw(c10835.98,9110.67) R14.2@10805.1,9079.79 ; v3@12079.63,8809.63 cw(c11892.83,8622.83) 12157,8622.83 ; v3@12090.23,8820.23 cw(c11929.04,8659.04) 12157,8659.04 ; v3@12100.84,8830.84 cw(c11965.25,8695.25) 12157,8695.25 ; v3@12111.45,8841.45 cw(c12001.47,8731.47) 12157,8731.47 ; v3@12122.05,8852.05 cw(c12037.68,8767.68) 12157,8767.68 ; LD1.1@12134.46,8569.54 ccw(c12080.06,8623.94) 12157,8623.94 ccw(c12233.94,8623.94) LD1.1@12179.54,8569.54 ; LD1.1@12145.07,8558.93 ccw(c12116.27,8587.73) 12157,8587.73 ccw(c12197.73,8587.73) LD1.1@12168.93,8558.93 ; LD1.1@12157,8547 v3@12157,8798 ; 12157,8753.19 cw(c12236.81,8753.19) v3@12180.37,8809.63
  Bottom Layer w60: K5.1@7650,10400 7650,10824 7791,10965 8591,10965 ; K2.1@8450,10400 8450,10824 8591,10965 ; K3.1@9250,10400 9250,10824 9391,10965 ; K1.1@10050,10400 10050,10824 10191,10965 ; K4.1@10835,10405 10835,10829 10971,10965 ; 11460,9465 11280,9645 11280,10900 11215,10965 10971,10965 ; 8591,10965 9391,10965 ; 9391,10965 10191,10965 ; 10191,10965 10971,10965
  other v3: 12130,8860 12130,9350
+BAT_UNFUSED: F1.1
  other v3: 12130,10810 12130,11300 12130,11700
+CAP: K6.1 LD2.1 R1.1 R2.1 R3.1 R9.2 R20.1 R21.1 | length 681.7
  Bottom Layer w15: R9.2@10779.52,8138.27 cw(c10748.63,8107.39) 10792.31,8107.39 cw(c10835.98,8107.39) R9.2@10805.1,8138.27 ; 10792.31,7992.69 R9.2@10792.31,8155 ; LD2.1@12134.46,8194.46 cw(c12080.06,8140.06) 12157,8140.06 cw(c12233.94,8140.06) LD2.1@12179.54,8194.46 ; LD2.1@12145.07,8205.07 cw(c12116.27,8176.27) 12157,8176.27 cw(c12197.73,8176.27) LD2.1@12168.93,8205.07 ; 12157,7951 LD2.1@12157,8217
  other v3: 12130,7140 12130,7630